# EAGLE board Bodenplatine_board (EAGLE 8.6.0)
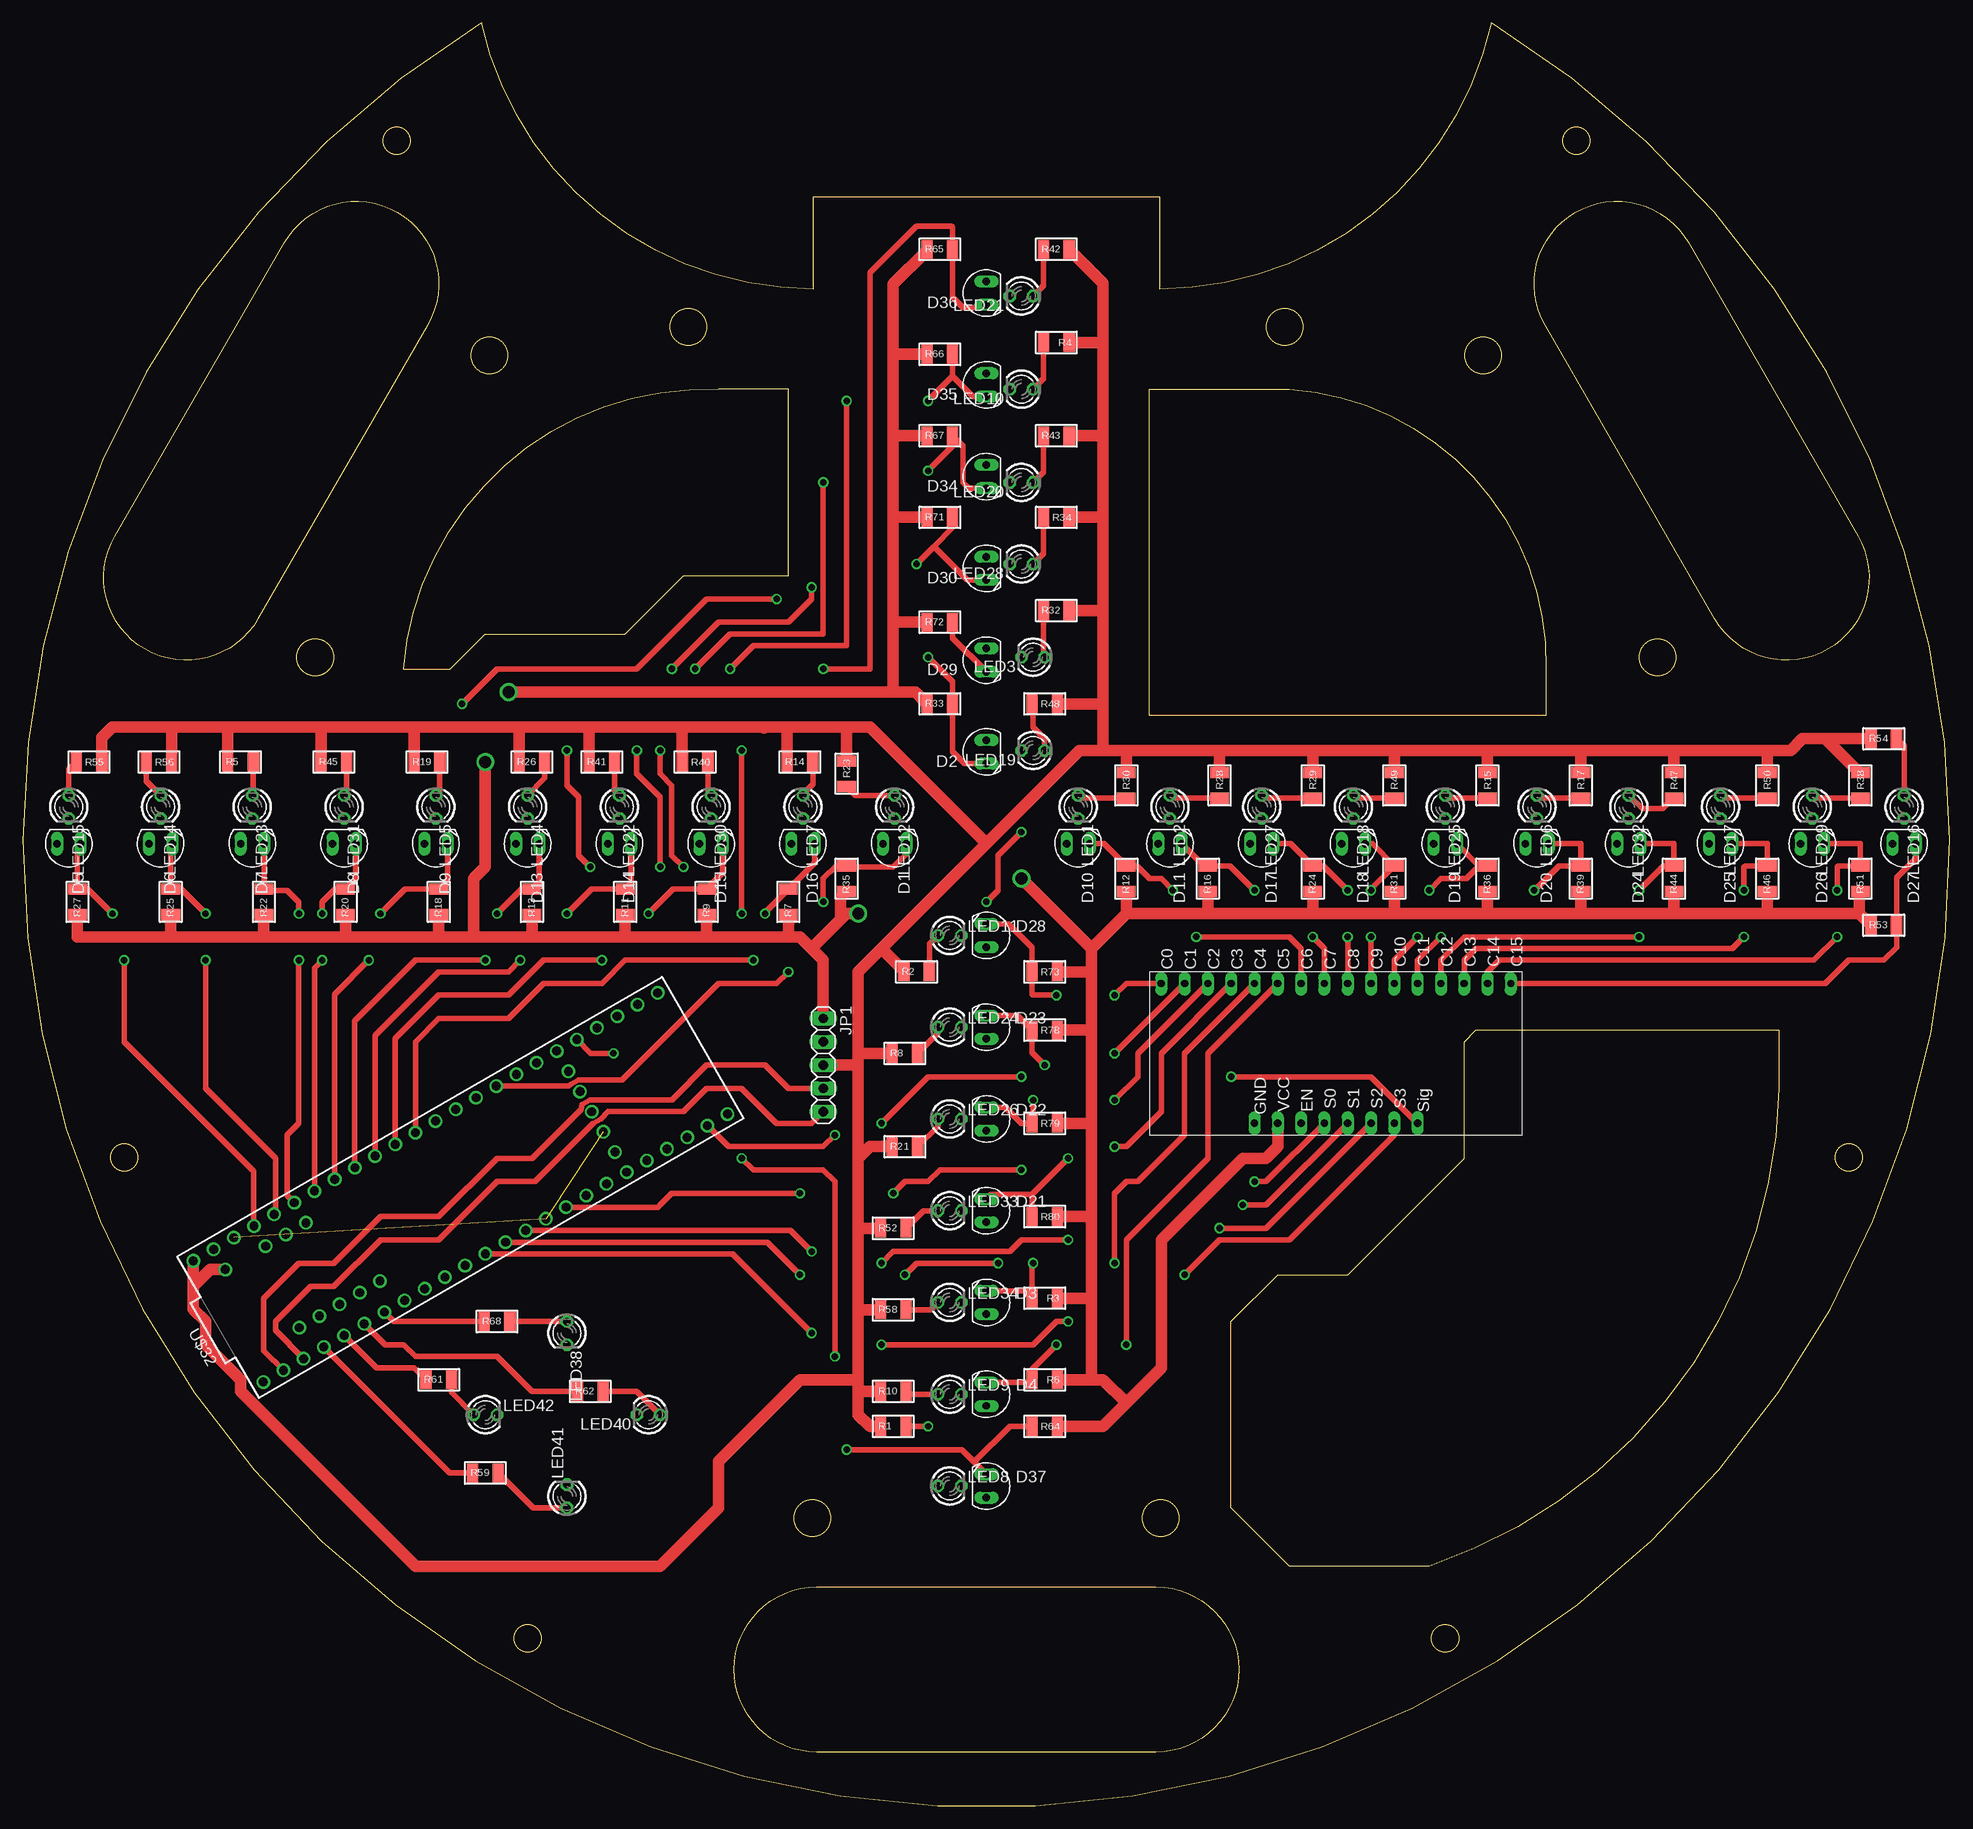
[diagram p0: board, top side]
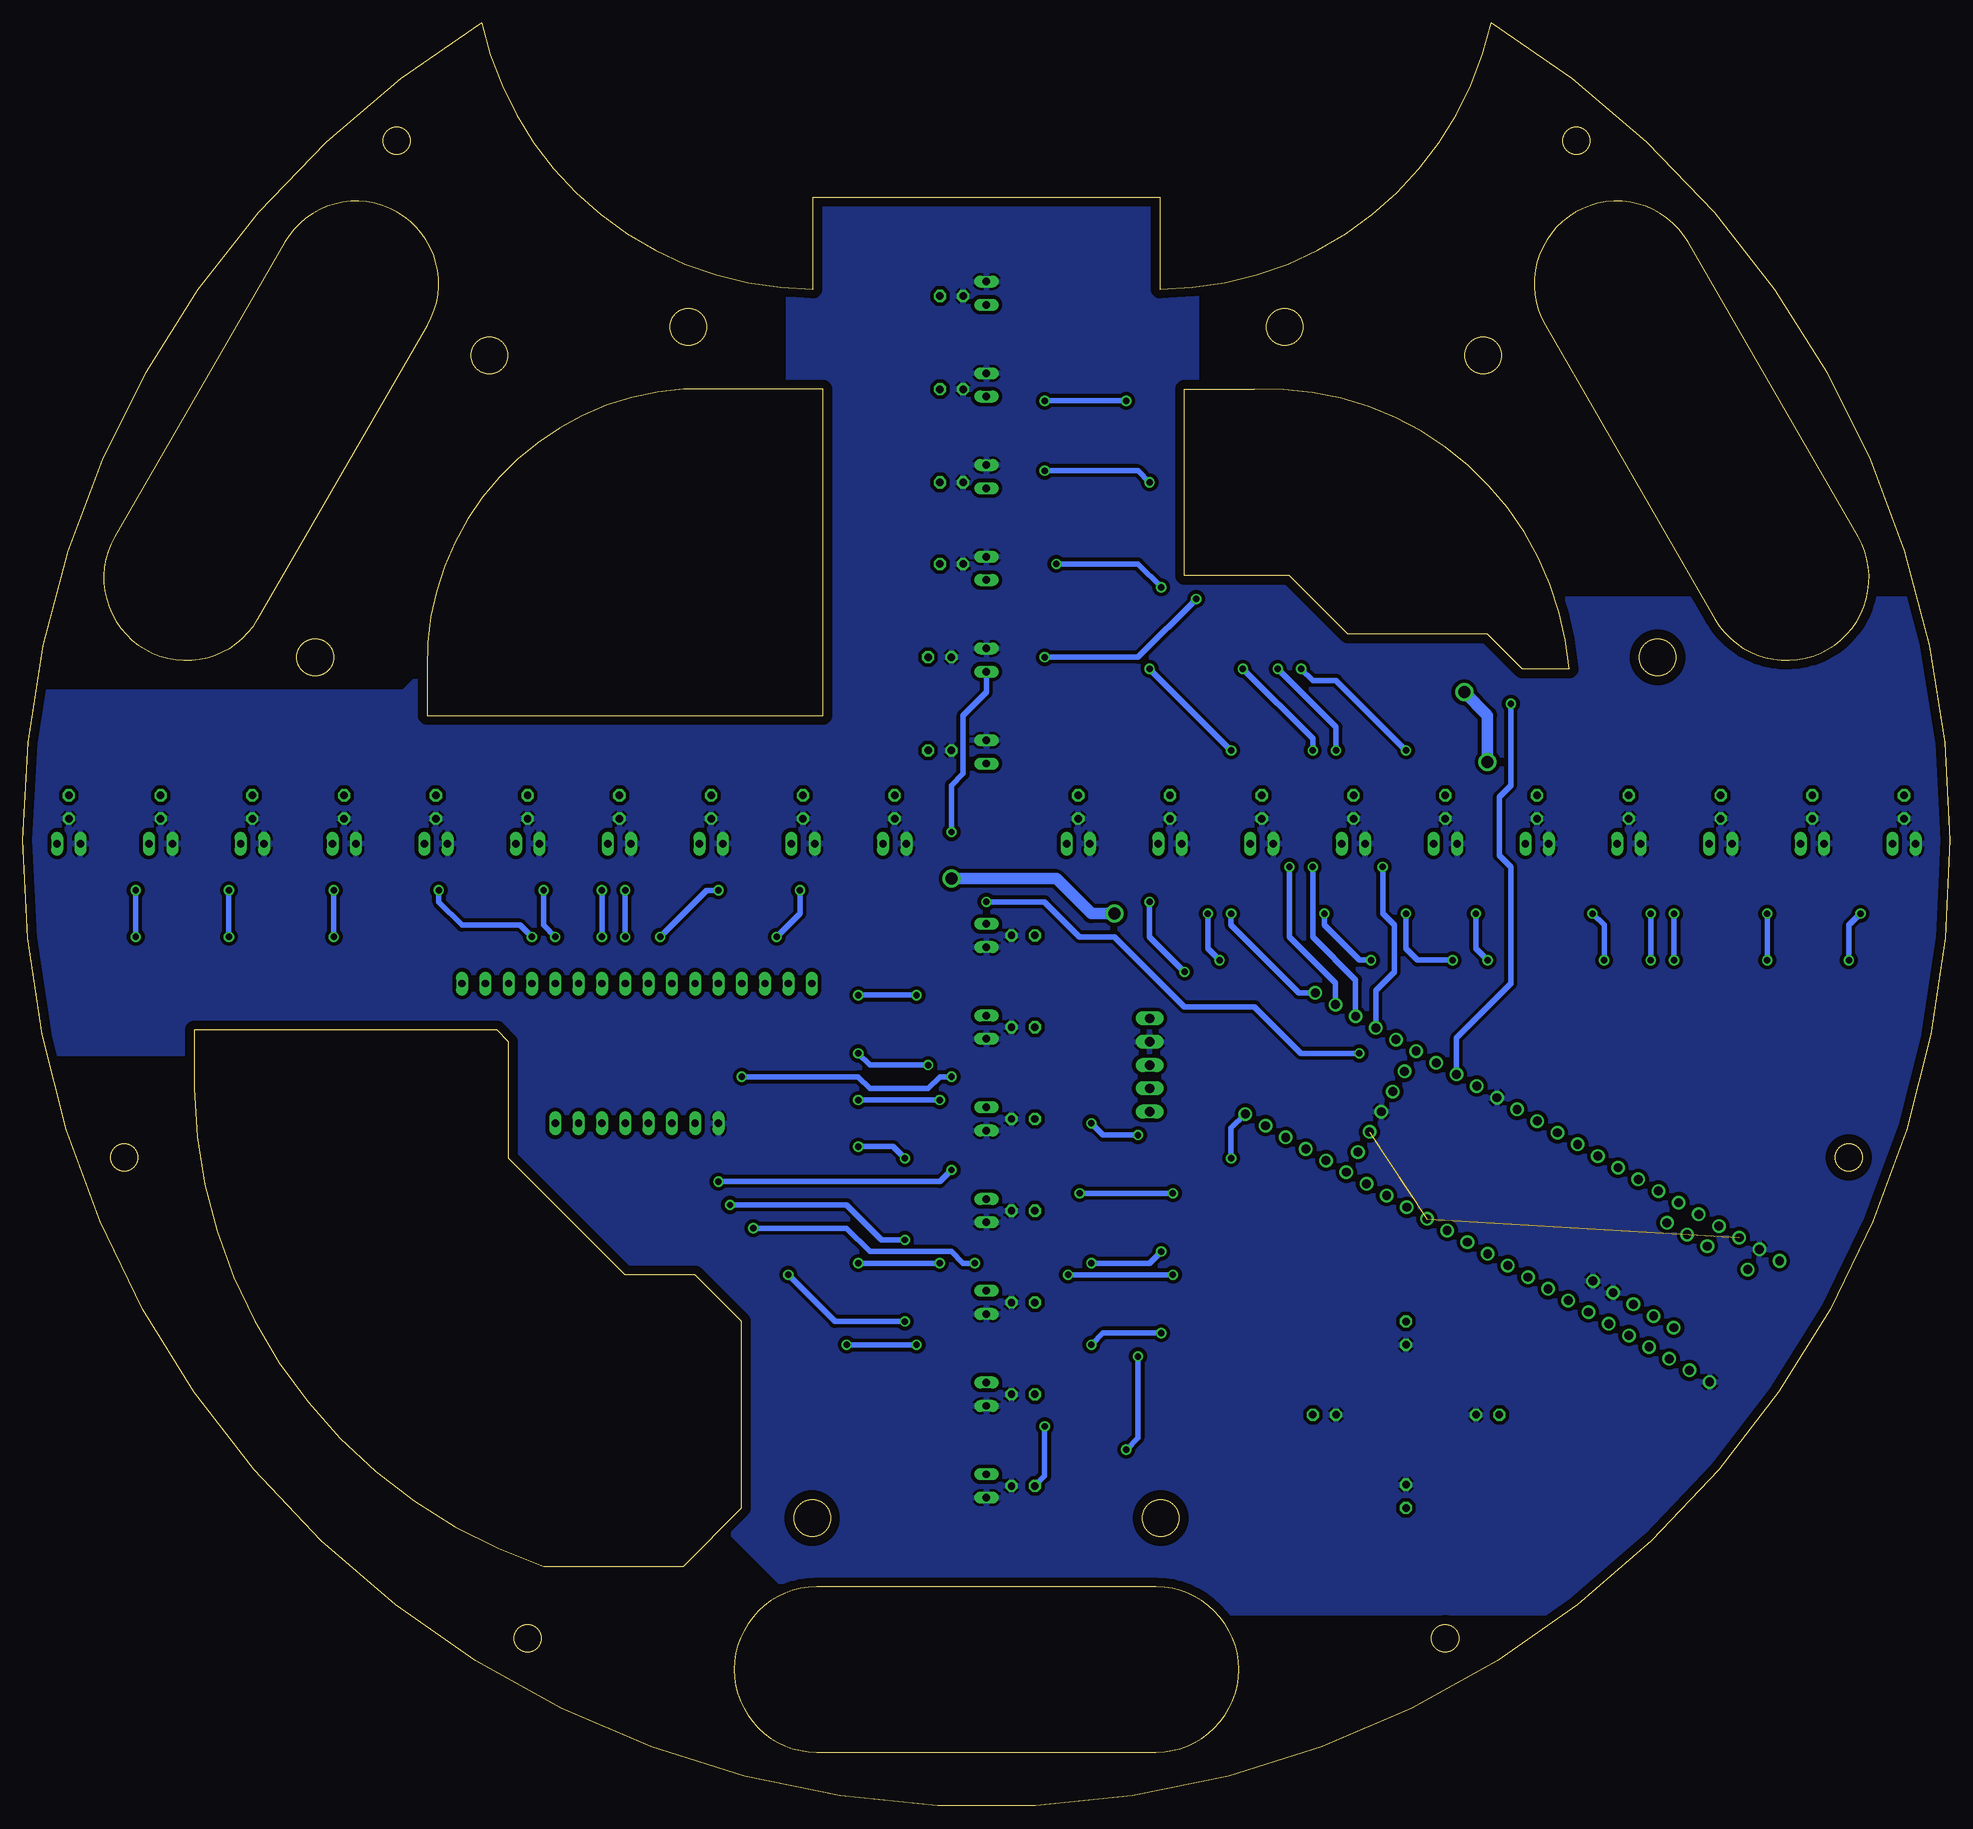
[diagram p1: board, bottom side, seen from below]

Size 210 x 194.31 mm. Coordinates in mm from the lower left corner, seen from the top.
Outline: 199.99,138.34 arc-180 184.4,129.34 165.9,161.39 arc-180 181.49,170.39 199.99,138.34
Outline: 86.5,5.86 arc-180 86.5,23.86 123.5,23.86 arc-180 123.5,5.86 86.5,5.86
Outline: 25.6,129.34 arc-180 10.01,138.34 28.51,170.39 arc-180 44.1,161.39 25.6,129.34
Outline: 123.88,165.31 123.88,175.31 86.12,175.31 86.12,165.31 arc-78 50,194.31 arc297 160,194.31 arc-78 123.88,165.31
Outline: 122.78,118.83 122.78,154.39 138.02,154.39 arc-88 165.96,123.91 165.96,118.83 122.78,118.83
Outline: 41.5,123.91 arc-88 75.79,154.39 83.41,154.39 83.41,134.07 71.98,134.07 65.63,127.72 50.39,127.72 46.58,123.91 41.5,123.91
Outline: 191.36,78.19 arc-70 153.26,26.12 138.02,26.12 131.67,32.47 131.67,52.79 136.75,57.87 144.37,57.87 157.07,70.57 157.07,83.27 158.34,84.54 191.36,84.54 191.36,78.19
Outline: circle at 124,31.36 radius 2
Outline: circle at 86,31.36 radius 2
Outline: circle at 178.15,125.16 radius 2
Outline: circle at 159.15,158.07 radius 2
Outline: circle at 50.85,158.07 radius 2
Outline: circle at 31.85,125.16 radius 2
Outline: circle at 137.5,161.16 radius 2
Outline: circle at 72.5,161.16 radius 2
Outline: circle at 169.28,181.47 radius 1.5
Outline: circle at 40.72,181.47 radius 1.5
Outline: circle at 155,18.26 radius 1.5
Outline: circle at 198.97,70.66 radius 1.5
Outline: circle at 55,18.26 radius 1.5
Outline: circle at 11.03,70.66 radius 1.5
Copper layers (1*16): Top 0.035mm / dielectric 1.5mm / Bottom 0.035mm
Design rules "default": minimum track width 6mil, minimum drill 0.35mm, track to track 6mil, track to pad 6mil, pad to pad 6mil, via to via 6mil, smd to smd 6mil, copper to edge 40mil, drill to drill 6mil, minimum pad ring 10mil, minimum via ring 8mil, stop-mask expansion 4mil, vias tented up to drill 0mil, thermal gap 10mil

## Footprints (pad centres in the part's own frame; a part is rotated, then mirrored left to right if it is on the bottom)
SFH205 = drill 0.813 long: A 0,-1.27; K 0,1.27
1X05 = drill 1.016 long: 1 -5.08,0; 2 -2.54,0; 3 0,0; 4 2.54,0; 5 5.08,0
LED3MM = drill 0.813 octagon: A -1.27,0; K 1.27,0
1206 = smd 1.219 x 2.032: 1 -1.397,0; 2 1.397,0
TEENSY_3.6_ALL_PINS = drill 0.965: 0 -7.62,25.4; 1 -7.62,22.86; 2 -7.62,20.32; 3 -7.62,17.78; 3.3V 7.62,22.86; 3.3V3 -7.62,-7.62; 3.3V4 -2.54,-17.78; 4 -7.62,15.24; 5 -7.62,12.7; 6 -7.62,10.16; 7 -7.62,7.62; 8 -7.62,5.08; 9 -7.62,2.54; 10 -7.62,0; 11 -7.62,-2.54; 12 -7.62,-5.08; 13 7.62,-5.08; 14/A0 7.62,-2.54; 15/A1 7.62,0; 16/A2 7.62,2.54; 17/A3 7.62,5.08; 18/A4 7.62,7.62; 19/A5 7.62,10.16; 20/A6 7.62,12.7; 21/A7 7.62,15.24; 22/A8 7.62,17.78; 23/A9 7.62,20.32; 24 -7.62,-10.16; 25 -7.62,-12.7; 26 -7.62,-15.24; 27 -7.62,-17.78; 28 -7.62,-20.32; 29 -7.62,-22.86; 30 -7.62,-25.4; 31/A12 -7.62,-27.94; 32/A13 -7.62,-30.48; 33/A14 7.62,-30.48; 34/A15 7.62,-27.94; 35/A16 7.62,-25.4; 36/A17 7.62,-22.86; 37/A18 7.62,-20.32; 38/A19 7.62,-17.78; 39/A20 7.62,-15.24; A10 5.08,17.78; A11 5.08,15.24; A21 7.62,-12.7; A22 7.62,-10.16; AGND 7.62,25.4; AREF 5.08,20.32; D+ -4.445,16.51; D- -4.445,19.05; GND -7.62,27.94; GND1 7.62,-7.62; GND3 -4.445,13.97; GND4 -4.445,11.43; GND6 0,-17.78; PGM 2.54,-17.78; RESET 5.08,-17.78; VBAT -5.08,-17.78; VIN 7.62,27.94; VUSB 5.08,25.4; VUSB1 -4.445,21.59
ANALOG/DIGITAL-MUX-BREAKOUT = drill 0.8 long: EN 16.51,16.51; GND 16.51,11.43; P$1 1.27,1.27; P$2 1.27,3.81; P$3 1.27,6.35; P$4 1.27,8.89; P$5 1.27,11.43; P$6 1.27,13.97; P$7 1.27,16.51; P$8 1.27,19.05; P$9 1.27,21.59; P$10 1.27,24.13; P$11 1.27,26.67; P$12 1.27,29.21; P$13 1.27,31.75; P$14 1.27,34.29; P$15 1.27,36.83; P$16 1.27,39.37; S0 16.51,19.05; S1 16.51,21.59; S2 16.51,24.13; S3 16.51,26.67; SIG 16.51,29.21; VCC 16.51,13.97

## Placement (x,y rotation side)
D1  SFH205  [SFH205]  95,104.86 270 top
D2  SFH205  [SFH205]  105,114.86 180 top
D3  SFH205  [SFH205]  105,54.86 0 top
D4  SFH205  [SFH205]  105,44.86 0 top
D5  SFH205  [SFH205]  5,104.86 270 top
D6  SFH205  [SFH205]  15,104.86 270 top
D7  SFH205  [SFH205]  25,104.86 270 top
D8  SFH205  [SFH205]  35,104.86 270 top
D9  SFH205  [SFH205]  45,104.86 270 top
D10  SFH205  [SFH205]  115,104.86 270 top
D11  SFH205  [SFH205]  125,104.86 270 top
D13  SFH205  [SFH205]  55,104.86 270 top
D14  SFH205  [SFH205]  65,104.86 270 top
D15  SFH205  [SFH205]  75,104.86 270 top
D16  SFH205  [SFH205]  85,104.86 270 top
D17  SFH205  [SFH205]  135,104.86 270 top
D18  SFH205  [SFH205]  145,104.86 270 top
D19  SFH205  [SFH205]  155,104.86 270 top
D20  SFH205  [SFH205]  165,104.86 270 top
D21  SFH205  [SFH205]  105,64.86 0 top
D22  SFH205  [SFH205]  105,74.86 0 top
D23  SFH205  [SFH205]  105,84.86 0 top
D24  SFH205  [SFH205]  175,104.86 270 top
D25  SFH205  [SFH205]  185,104.86 270 top
D26  SFH205  [SFH205]  195,104.86 270 top
D27  SFH205  [SFH205]  205,104.86 270 top
D28  SFH205  [SFH205]  105,94.86 0 top
D29  SFH205  [SFH205]  105,124.86 180 top
D30  SFH205  [SFH205]  105,134.86 180 top
D34  SFH205  [SFH205]  105,144.86 180 top
D35  SFH205  [SFH205]  105,154.86 180 top
D36  SFH205  [SFH205]  105,164.86 180 top
D37  SFH205  [SFH205]  105,34.86 0 top
JP1  [1X05]  87.22,80.73 270 top
LED1  [LED3MM]  115,108.86 270 top
LED2  [LED3MM]  125,108.86 270 top
LED3  [LED3MM]  110.08,125.18 180 top
LED4  [LED3MM]  55,108.86 270 top
LED5  [LED3MM]  45,108.86 270 top
LED6  [LED3MM]  165,108.86 270 top
LED7  [LED3MM]  85,108.86 270 top
LED8  [LED3MM]  101,34.86 0 top
LED9  [LED3MM]  101,44.86 0 top
LED10  [LED3MM]  108.81,154.39 180 top
LED11  [LED3MM]  101,94.86 0 top
LED12  [LED3MM]  95,108.86 270 top
LED14  [LED3MM]  15,108.86 270 top
LED15  [LED3MM]  5,108.86 270 top
LED16  [LED3MM]  205,108.86 270 top
LED17  [LED3MM]  185,108.86 270 top
LED18  [LED3MM]  145,108.86 270 top
LED19  [LED3MM]  110.08,115.02 180 top
LED20  [LED3MM]  108.81,144.23 180 top
LED21  [LED3MM]  108.81,164.55 180 top
LED22  [LED3MM]  65,108.86 270 top
LED23  [LED3MM]  24.99,108.86 270 top
LED24  [LED3MM]  101,84.86 0 top
LED25  [LED3MM]  155,108.86 270 top
LED26  [LED3MM]  101,74.86 0 top
LED27  [LED3MM]  135,108.86 270 top
LED28  [LED3MM]  108.81,135.34 180 top
LED29  [LED3MM]  195,108.86 270 top
LED30  [LED3MM]  75,108.86 270 top
LED31  [LED3MM]  35,108.86 270 top
LED32  [LED3MM]  175,108.86 270 top
LED33  [LED3MM]  101,64.86 0 top
LED34  [LED3MM]  101,54.86 0 top
LED38  [LED3MM]  59.28,51.52 270 top
LED40  [LED3MM]  68.17,42.63 180 top
LED41  [LED3MM]  59.28,33.74 90 top
LED42  [LED3MM]  50.39,42.63 0 top
R1  60R  [1206]  94.84,41.36 0 top
R2  60R  [1206]  97.38,90.89 0 top
R3  5k  [1206]  111.35,55.33 180 top
R4  60R  [1206]  112.62,159.47 180 top
R5  60R  [1206]  23.72,113.75 0 top
R6  5k  [1206]  111.35,46.44 180 top
R7  5k  [1206]  83.41,98.51 90 top
R8  60R  [1206]  96.11,82 0 top
R9  5k  [1206]  74.52,98.51 90 top
R10  60R  [1206]  94.84,45.17 0 top
R11  5k  [1206]  65.63,98.51 90 top
R12  5k  [1206]  120.24,101.05 90 top
R13  5k  [1206]  55.47,98.51 90 top
R14  60R  [1206]  84.68,113.75 0 top
R15  60R  [1206]  159.61,111.21 270 top
R16  5k  [1206]  129.13,101.05 90 top
R17  60R  [1206]  169.77,111.21 270 top
R18  5k  [1206]  45.31,98.51 90 top
R19  60R  [1206]  44.04,113.75 0 top
R20  5k  [1206]  35.15,98.51 90 top
R21  60R  [1206]  96.11,71.84 0 top
R22  5k  [1206]  26.26,98.51 90 top
R23  60R  [1206]  89.76,112.48 270 top
R24  5k  [1206]  140.56,101.05 90 top
R25  5k  [1206]  16.1,98.51 90 top
R26  60R  [1206]  55.47,113.75 0 top
R27  5k  [1206]  5.94,98.51 90 top
R28  60R  [1206]  130.4,111.21 270 top
R29  60R  [1206]  140.56,111.21 270 top
R30  60R  [1206]  120.24,111.21 270 top
R31  5k  [1206]  149.45,101.05 90 top
R32  60R  [1206]  112.62,130.26 0 top
R33  5k  [1206]  99.92,120.1 0 top
R34  60R  [1206]  112.62,140.42 180 top
R35  5k  [1206]  89.76,101.05 90 top
R36  5k  [1206]  159.61,101.05 90 top
R38  60R  [1206]  200.25,111.21 270 top
R39  5k  [1206]  169.77,101.05 90 top
R40  60R  [1206]  73.25,113.75 180 top
R41  60R  [1206]  63.09,113.75 0 top
R42  60R  [1206]  112.62,169.63 0 top
R43  60R  [1206]  112.62,149.31 0 top
R44  5k  [1206]  179.93,101.05 90 top
R45  60R  [1206]  33.88,113.75 0 top
R46  5k  [1206]  190.09,101.05 90 top
R47  60R  [1206]  179.93,111.21 270 top
R48  60R  [1206]  111.35,120.1 180 top
R49  60R  [1206]  149.45,111.21 270 top
R50  60R  [1206]  190.09,111.21 270 top
R51  5k  [1206]  200.25,101.05 90 top
R52  60R  [1206]  94.84,62.95 0 top
R53  5k  [1206]  202.79,95.97 0 top
R54  60R  [1206]  202.79,116.29 0 top
R55  60R  [1206]  7.21,113.75 180 top
R56  60R  [1206]  14.83,113.75 180 top
R58  60R  [1206]  94.84,54.06 0 top
R59  60R  [1206]  50.39,36.28 0 top
R61  60R  [1206]  45.31,46.44 0 top
R62  60R  [1206]  61.82,45.17 0 top
R64  5k  [1206]  111.35,41.36 180 top
R65  5k  [1206]  99.92,169.63 0 top
R66  5k  [1206]  99.92,158.2 0 top
R67  5k  [1206]  99.92,149.31 0 top
R68  60R  [1206]  51.66,52.79 0 top
R71  5k  [1206]  99.92,140.42 0 top
R72  5k  [1206]  99.92,128.99 0 top
R73  5k  [1206]  111.35,90.89 180 top
R78  5k  [1206]  111.35,84.54 180 top
R79  5k  [1206]  111.35,74.38 180 top
R80  5k  [1206]  111.35,64.22 180 top
U$32  TEENSY_3.6_ALL_PINS  [TEENSY_3.6_ALL_PINS]  46.58,66.76 120 top
X1  ANALOG/DIGITAL-MUX-BREAKOUT  [ANALOG/DIGITAL-MUX-BREAKOUT]  122.78,90.89 270 top

## Library data of the parts
D1-D11 D13-D30 D34-D37 = opto-trans-siemens; OC_FARNELL: unknown; OC_NEWARK: unknown
JP1 = pinhead
LED1-LED12 LED14-LED34 LED38 LED40-LED42 = led
R1-R36 R38-R56 R58 R59 R61 R62 R64-R68 R71-R73 R78-R80 = R
U$32 = Teensy_3_and_LC_Series_Boards_v1.4
X1 = Analog-Digital

## Nets
3.3V: U$32.3.3V U$32.3.3V3 U$32.3.3V4
+3V3: JP1.1 R3.1 R6.1 R7.1 R9.1 R11.1 R12.1 R13.1 R16.1 R18.1 R20.1 R22.1 R24.1 R25.1 R27.1 R31.1 R33.1 R35.1 R36.1 R39.1 R44.1 R46.1 R51.1 R53.1 R64.1 R65.1 R66.1 R67.1 R71.1 R72.1 R73.1 R78.1 R79.1 R80.1 X1.VCC
+5V: JP1.3 R1.1 R2.1 R4.1 R5.1 R8.1 R10.1 R14.1 R15.1 R17.1 R19.1 R21.1 R23.1 R26.1 R28.1 R29.1 R30.1 R32.2 R34.1 R38.1 R40.2 R41.1 R42.2 R43.2 R45.1 R47.1 R48.1 R49.1 R50.1 R52.1 R54.1 R55.1 R56.1 R58.1 U$32.VIN U$32.VUSB
A1: D16.K R7.2 U$32.15/A1
A2: D15.K R9.2 U$32.16/A2
A3: D14.K R11.2 U$32.17/A3
A4: D13.K R13.2 U$32.18/A4
A5: D9.K R18.2 U$32.19/A5
A6: D8.K R20.2 U$32.20/A6
A7: D7.K R22.2 U$32.21/A7
A8: D6.K R25.2 U$32.22/A8
A9: D5.K R27.2 U$32.23/A9
A10: D2.K R33.2 U$32.A21
A11: D1.K R35.2 U$32.A22
A13: D37.K R64.2 U$32.32/A13
A14: D36.K R65.2 U$32.33/A14
A15: D35.K R66.2 U$32.34/A15
A16: D34.K R67.2 U$32.35/A16
A17: D30.K R71.2 U$32.36/A17
A18: D29.K R72.2 U$32.37/A18
A19: D28.K R73.2 X1.P$1
A20: D23.K R78.2 X1.P$2
A21: D22.K R79.2 X1.P$3
A22: D21.K R80.2 X1.P$4
A23: D3.K R3.2 X1.P$5
A24: D4.K R6.2 X1.P$6
A25: D10.K R12.2 X1.P$7
A26: D11.K R16.2 X1.P$8
A27: D17.K R24.2 X1.P$9
A28: D18.K R31.2 X1.P$10
A29: D19.K R36.2 X1.P$11
A30: D20.K R39.2 X1.P$12
A31: D24.K R44.2 X1.P$13
A32: D25.K R46.2 X1.P$14
A33: D26.K R51.2 X1.P$15
A34: D27.K R53.2 X1.P$16
AREF: U$32.AREF
GND: D1.A D2.A D3.A D4.A D5.A D6.A D7.A D8.A D9.A D10.A D11.A D13.A D14.A D15.A D16.A D17.A D18.A D19.A D20.A D21.A D22.A D23.A D24.A D25.A D26.A D27.A D28.A D29.A D30.A D34.A D35.A D36.A D37.A JP1.2 LED1.K LED2.K LED3.K LED4.K LED5.K LED6.K LED7.K LED8.K LED9.K LED10.K LED11.K LED12.K LED14.K LED15.K LED16.K LED17.K LED18.K LED19.K LED20.K LED21.K LED22.K LED23.K LED24.K LED25.K LED26.K LED27.K LED28.K LED29.K LED30.K LED31.K LED32.K LED33.K LED34.K LED38.K LED40.K LED41.K LED42.K U$32.AGND U$32.GND U$32.GND1 U$32.GND3 U$32.GND4 U$32.GND6 X1.GND
N$1: LED8.A R1.2
N$2: LED11.A R2.2
N$3: LED23.A R5.2
N$4: LED10.A R4.2
N$5: LED24.A R8.2
N$6: LED25.A R15.2
N$7: LED26.A R21.2
N$8: LED27.A R29.2
N$9: LED28.A R34.2
N$10: LED9.A R10.2
N$11: LED29.A R38.2
N$12: LED30.A R40.1
N$13: LED12.A R23.2
N$14: LED31.A R45.2
N$15: LED32.A R47.2
N$16: LED7.A R14.2
N$17: LED33.A R52.2
N$18: LED6.A R17.2
N$19: LED3.A R32.1
N$20: LED5.A R19.2
N$21: LED34.A R58.2
N$22: LED41.A R59.2
N$23: LED42.A R61.2
N$24: LED40.A R62.2
N$25: LED38.A R68.2
N$26: LED4.A R26.2
N$28: LED2.A R28.2
N$30: LED1.A R30.2
N$33: R68.1 U$32.5
N$42: LED22.A R41.2
N$44: LED21.A R42.1
N$46: LED20.A R43.1
N$56: LED19.A R48.2
N$58: LED18.A R49.2
N$60: LED17.A R50.2
N$68: LED16.A R54.2
N$70: LED15.A R55.2
N$72: LED14.A R56.2
RIX2: R62.1 U$32.4
RIX3: R61.1 U$32.3
RIX4: R59.1 U$32.2
RX: JP1.5 U$32.1
S_0: U$32.24 X1.S0
S_1: U$32.12 X1.S1
S_2: U$32.11 X1.S2
S_3: U$32.10 X1.S3
SIG: U$32.31/A12 X1.SIG
TX: JP1.4 U$32.0
VBAT: U$32.VBAT
VUSB1: U$32.VUSB1

## Tracks (layer width: path | path; a pad name or v marks a point on that pad's centre or on a via)
3.3V  (2 unrouted)
+3V3  (via drill 1.3)
  Top 1.27: JP1.1 87.22,92.16 85.95,93.43 | 85.95,93.43 84.68,94.7 83.41,94.7 | R27.1 5.94,94.7 16.1,94.7 | 16.1,94.7 26.26,94.7 | 26.26,94.7 35.15,94.7 | 35.15,94.7 45.31,94.7 | 45.31,94.7 49.12,94.7 | 49.12,94.7 55.47,94.7 | 55.47,94.7 65.63,94.7 | 65.63,94.7 74.52,94.7 | 74.52,94.7 83.41,94.7 | R25.1 16.1,94.7 | R22.1 26.26,94.7 | R20.1 35.15,94.7 | R18.1 45.31,94.7 | R13.1 55.47,94.7 | R11.1 65.63,94.7 | R9.1 74.52,94.7 | 49.12,94.7 49.12,101.05 50.39,102.32 v50.39,113.75 | v52.93,121.37 94.84,121.37 | 94.84,121.37 94.84,128.99 | 94.84,128.99 94.84,140.42 | 94.84,140.42 94.84,149.31 | 94.84,149.31 94.84,158.2 | 94.84,158.2 94.84,165.82 98.52,169.51 R65.1 | 85.95,93.43 89.12,96.61 | 89.12,96.61 89.76,97.24 v91.03,97.24 | v108.81,101.05 116.43,93.43 | 116.43,93.43 116.43,90.89 | 116.43,90.89 116.43,84.54 | 116.43,84.54 116.43,74.38 | 116.43,74.38 116.43,64.22 | 116.43,64.22 116.43,55.33 | 116.43,55.33 116.43,46.44 | 116.43,93.43 120.24,97.24 | 200.12,97.24 R53.1 | 120.24,97.24 129.13,97.24 | 129.13,97.24 140.56,97.24 | 140.56,97.24 149.45,97.24 | 149.45,97.24 159.61,97.24 | 159.61,97.24 169.77,97.24 | 169.77,97.24 179.93,97.24 | 179.93,97.24 190.09,97.24 | 190.09,97.24 200.12,97.24 | 120.24,97.24 R12.1 | R16.1 129.13,97.24 | R24.1 140.56,97.24 | R31.1 149.45,97.24 | R36.1 159.61,97.24 | R39.1 169.77,97.24 | R44.1 179.93,97.24 | R46.1 190.09,97.24 | R51.1 200.12,99.53 200.12,97.24 | R73.1 116.43,90.89 | R78.1 116.43,84.54 | R79.1 116.43,74.38 | R80.1 116.43,64.22 | R3.1 116.43,55.33 | R6.1 116.43,46.44 | X1.VCC 136.75,71.84 135.48,70.57 132.94,70.57 124.05,61.68 124.05,47.71 120.24,43.9 | R66.1 94.84,158.2 | R67.1 94.84,149.31 | R71.1 94.84,140.42 | R72.1 94.84,128.99 | R33.1 97.25,121.37 94.84,121.37
  Top 1.27: 89.12,96.61 89.12,99.02 R35.1 | 120.24,43.9 117.7,41.36 R64.1 | 116.43,46.44 117.7,46.44 120.24,43.9 | R7.1 83.41,94.7
  Bottom 1.27: v50.39,113.75 50.39,118.83 v52.93,121.37 | v91.03,97.24 93.57,97.24 97.38,101.05 v108.81,101.05
+5V
  Top 0.61: 93.57,93.31 93.57,93.43
  Top 1.27: JP1.3 91.03,80.73 | 91.03,80.73 91.03,70.57 | 91.03,70.57 91.03,62.95 | 91.03,62.95 91.03,54.06 | 91.03,54.06 91.03,46.44 | 91.03,80.73 91.03,82 | 91.03,82 91.03,90.89 93.57,93.43 | 93.57,93.43 105,104.86 | 105,104.86 92.3,117.56 89.76,117.56 | 16.1,117.56 9.75,117.56 8.61,116.42 R55.1 | 16.1,117.56 22.45,117.56 | 22.45,117.56 32.61,117.56 | 32.61,117.56 42.77,117.56 | 61.82,117.56 71.98,117.56 | 71.98,117.56 80.87,117.56 | 80.87,117.56 83.41,117.56 | 83.41,117.56 89.76,117.56 | 117.7,115.02 115.16,115.02 105,104.86 | 117.7,115.02 117.7,120.1 | 117.7,120.1 117.7,130.26 | 117.7,130.26 117.7,140.42 | 117.7,140.42 117.7,149.31 | 117.7,149.31 117.7,159.47 | 117.7,159.47 117.7,165.95 R42.2 | R48.1 117.7,120.1 | R32.2 117.7,130.26 | R34.1 117.7,140.42 | R43.2 117.7,149.31 | R4.1 117.7,159.47 | 117.7,115.02 120.24,115.02 | 120.24,115.02 130.4,115.02 | 130.4,115.02 140.56,115.02 | 140.56,115.02 149.45,115.02 | 149.45,115.02 159.61,115.02 | 159.61,115.02 169.77,115.02 | 169.77,115.02 179.93,115.02 | 179.93,115.02 190.09,115.02 | 190.09,115.02 192.63,115.02 193.9,116.29 196.44,116.29 | 196.44,116.29 R54.1 | R30.1 120.24,115.02 | R28.1 130.4,115.02 | R29.1 140.56,115.02 | R49.1 149.45,115.02 | R15.1 159.61,115.02 | R17.1 169.77,115.02 | R47.1 179.93,115.02 | R50.1 190.09,115.02 | R38.1 200.12,112.61 196.44,116.29 | R56.1 16.23,117.44 16.1,117.56 | R5.1 22.32,117.44 22.45,117.56 | R45.1 32.48,117.44 32.61,117.56 | R19.1 42.64,117.44 42.77,117.56 | R41.1 61.69,117.44 61.82,117.56 | R40.2 71.85,117.44 71.98,117.56 | 80.74,117.44 80.87,117.56 | 42.77,117.56 54.2,117.56 | 54.2,117.56 61.82,117.56 | R26.1 54.07,117.44 54.2,117.56 | R14.1 83.28,117.44 83.41,117.56 | R23.1 89.76,117.56
  Top 1.27: U$32.VIN 18.57,56.6 | 18.57,56.6 18.57,54.13 19.91,52.79 19.91,50.25 23.72,46.44 23.72,45.17 42.77,26.12 69.44,26.12 75.79,32.47 75.79,37.55 84.68,46.44 91.03,46.44 | R1.1 92.3,41.36 91.03,42.63 91.03,45.17 | 91.03,46.44 91.03,45.17 | R10.1 91.03,45.17 | R58.1 91.03,54.06 | R52.1 91.03,62.95 | R21.1 92.3,71.84 91.03,70.57 | R2.1 95.98,91.02 93.57,93.43 | R8.1 91.03,82 | U$32.VUSB 20.43,58.46 18.57,56.6
A1  (via drill 0.7)
  Top 0.61: U$32.15/A1 42.77,83.27 45.31,85.81 52.93,85.81 56.74,89.62 63.09,89.62 65.63,92.16 v79.6,92.16 | v80.87,97.24 80.87,97.37 R7.2 86.27,102.77 D16.K
  Bottom 0.61: v79.6,92.16 80.87,93.43 v80.87,97.24
A2  (via drill 0.7)
  Top 0.61: U$32.16/A2 40.57,83.61 45.31,88.35 52.93,88.35 56.74,92.16 v63.09,92.16 | v68.17,97.24 70.84,99.91 R9.2 76.27,101.66 D15.K
  Bottom 0.61: v63.09,92.16 64.36,92.16 68.17,95.97 v68.17,97.24
A3  (via drill 0.7)
  Top 0.61: U$32.17/A3 38.37,83.96 45.31,90.89 52.93,90.89 v54.2,92.16 | v59.28,97.24 61.95,99.91 R11.2 66.27,100.55 D14.K
  Bottom 0.61: v54.2,92.16 58.01,92.16 59.28,93.43 v59.28,97.24
A4  (via drill 0.7)
  Top 0.61: U$32.18/A4 36.17,85.57 42.77,92.16 v50.39,92.16 | v51.66,97.24 54.33,99.91 R13.2 56.27,100.71 D13.K
  Bottom 0.61: v50.39,92.16 51.66,93.43 v51.66,97.24
A5  (via drill 0.7)
  Top 0.61: U$32.19/A5 33.97,88.45 v37.69,92.16 | v38.96,97.24 41.63,99.91 R18.2 46.27,100.87 D9.K
  Bottom 0.61: v37.69,92.16 37.69,95.97 v38.96,97.24
A6  (via drill 0.7)
  Top 0.61: U$32.20/A6 31.77,91.33 v32.61,92.16 | v32.61,97.24 32.61,98.51 34.01,99.91 R20.2 36.27,101.03 D8.K
  Bottom 0.61: v32.61,92.16 v32.61,97.24
A7  (via drill 0.7)
  Top 0.61: D7.K R22.2 26.39,99.78 28.8,99.78 30.07,98.51 v30.07,97.24 | v30.07,92.16 30.07,74.38 28.8,73.11 28.8,66.52 U$32.21/A7
  Bottom 0.61: v30.07,97.24 v30.07,92.16
A8  (via drill 0.7)
  Top 0.61: D6.K 16.1,104.69 R25.2 17.24,99.91 v19.91,97.24 | v19.91,92.16 19.91,78.19 27.53,70.57 27.53,64.63 U$32.22/A8
  Bottom 0.61: v19.91,97.24 v19.91,92.16
A9  (via drill 0.7)
  Top 0.61: U$32.23/A9 25.17,69.12 11.02,83.27 v11.02,92.16 | D5.K 5.94,104.53 R27.2 7.08,99.91 v9.75,97.24
  Bottom 0.61: v11.02,92.16 11.02,95.97 v9.75,97.24
A10  (via drill 0.7)
  Top 0.61: D2.K 102.62,113.59 101.32,114.9 R33.2 101.32,122.52 v98.65,125.18 | v47.85,120.1 51.66,123.91 66.9,123.91 74.52,131.53 v82.14,131.53
  Bottom 0.61: U$32.A21 53.77,83.71 47.85,89.62 47.85,102.32 49.12,103.59 49.12,109.94 47.85,111.21 v47.85,120.1 | v82.14,131.53 88.49,125.18 v98.65,125.18
A11  (via drill 0.7)
  Top 0.61: U$32.A22 53.9,78.44 53.94,78.43 53.96,78.44 59.49,78.44 59.68,78.64 60.54,79.14 65.3,79.14 75.79,89.62 82.14,89.62 v83.41,90.89 | v87.22,98.51 87.22,101.05 88.62,102.45 R35.2 89.89,102.32 94.84,102.32 96.27,103.75 D1.K
  Bottom 0.61: v83.41,90.89 87.22,94.7 v87.22,98.51
A13  (via drill 0.7)
  Top 0.61: v78.33,70.57 79.6,69.3 87.22,69.3 88.49,68.03 v88.49,48.98 | D37.K 103.65,37.48 | 103.65,37.48 102.31,38.82 v89.76,38.82 | R64.2 107.54,41.36 103.65,37.48
  Bottom 0.61: U$32.32/A13 78.33,73.86 v78.33,70.57 | v89.76,38.82 88.49,40.09 v88.49,48.98
A14  (via drill 0.7)
  Top 0.61: v78.33,97.24 v78.33,115.02 | v87.22,123.91 92.3,123.91 92.3,167.09 97.38,172.17 101.19,172.17 101.32,172.05 R65.2 101.32,164.43 102.46,163.28 104.69,163.28 D36.K
  Bottom 0.61: U$32.33/A14 70.96,88.6 78.33,95.97 v78.33,97.24 | v78.33,115.02 v87.22,123.91
A15  (via drill 0.7)
  Top 0.61: v71.98,102.32 70.71,103.59 70.71,111.21 69.44,112.48 v69.44,115.02 | v77.06,123.91 79.6,126.45 89.76,126.45 v89.76,153.12 | v98.65,153.12 101.32,155.79 | 101.32,155.79 R66.2 | 101.32,155.79 103.51,153.59 D35.K
  Bottom 0.61: U$32.34/A15 66.97,89.69 71.98,94.7 v71.98,102.32 | v69.44,115.02 69.44,116.29 v77.06,123.91 | v89.76,153.12 v98.65,153.12
A16  (via drill 0.7)
  Top 0.61: v69.44,102.32 69.44,109.94 66.9,112.48 v66.9,115.02 | v73.25,123.91 77.06,127.72 87.22,127.72 v87.22,144.23 | v98.65,145.5 101.32,148.17 R67.2 102.46,148.17 102.46,144.23 103.1,143.59 D34.K
  Bottom 0.61: U$32.35/A16 64.77,90.03 69.44,94.7 v69.44,102.32 | v66.9,115.02 66.9,117.56 v73.25,123.91 | v87.22,144.23 88.49,145.5 v98.65,145.5
A17  (via drill 0.7)
  Top 0.61: v61.82,102.32 60.55,103.59 60.55,109.94 59.28,111.21 v59.28,115.02 | v70.71,123.91 75.79,128.99 83.41,128.99 85.95,131.53 v85.95,132.8 | v97.38,135.34 99.28,137.25 | 99.28,137.25 101.32,139.28 R71.2 | D30.K 102.94,133.59 99.28,137.25
  Bottom 0.61: U$32.36/A17 62.57,88.88 60.55,90.89 60.55,95.97 61.82,97.24 v61.82,102.32 | v59.28,115.02 66.9,122.64 69.44,122.64 v70.71,123.91 | v85.95,132.8 88.49,135.34 v97.38,135.34
A18  (via drill 0.7)
  Top 0.61: U$32.37/A18 61.89,82 v64.36,82 | v105,98.51 106.27,99.78 106.27,103.59 v108.81,106.13 | R72.2 101.32,127.28 D29.K
  Bottom 0.61: v64.36,82 70.71,82 75.79,87.08 83.41,87.08 91.03,94.7 94.84,94.7 98.65,98.51 v105,98.51 | v108.81,106.13 108.81,111.21 107.54,112.48 107.54,118.83 105,121.37 D29.K 104.68,123.91
A19  (via drill 0.7)
  Top 0.61: X1.P$1 120.24,89.62 v118.97,88.35 | v112.62,88.35 110.08,88.35 109.95,88.48 R73.2 109.95,93.56 107.38,96.13 D28.K
  Bottom 0.61: v118.97,88.35 v112.62,88.35
A20  (via drill 0.7)
  Top 0.61: X1.P$2 v118.97,82 | v111.35,80.73 109.95,82.13 R78.2 108.36,86.13 D23.K
  Bottom 0.61: v118.97,82 117.7,80.73 v111.35,80.73
A21  (via drill 0.7)
  Top 0.61: X1.P$3 121.51,82 121.51,79.46 v118.97,76.92 | v110.08,76.92 110.08,74.51 R79.2 108.81,74.38 107.06,76.13 D22.K
  Bottom 0.61: v118.97,76.92 v110.08,76.92
A22  (via drill 0.7)
  Top 0.61: X1.P$4 124.05,82 124.05,75.65 120.24,71.84 v118.97,71.84 | v113.89,70.57 109.95,66.64 | 109.95,66.64 R80.2 | 109.95,66.64 105.5,66.64 D21.K
  Bottom 0.61: v118.97,71.84 115.16,71.84 v113.89,70.57
A23  (via drill 0.7)
  Top 0.61: X1.P$5 126.59,82 126.59,73.11 121.51,68.03 120.24,68.03 118.97,66.76 v118.97,59.14 | v110.08,59.14 109.95,59.02 R3.2 109.15,56.13 D3.K
  Bottom 0.61: v118.97,59.14 v110.08,59.14
A24  (via drill 0.7)
  Top 0.61: X1.P$6 129.13,82 129.13,70.57 120.24,61.68 v120.24,50.25 | v112.62,50.25 109.95,47.59 R6.2 109.64,46.13 D4.K
  Bottom 0.61: v120.24,50.25 v112.62,50.25
A25  (via drill 0.7)
  Top 0.61: X1.P$7 139.29,93.43 138.02,94.7 v127.86,94.7 | v125.32,99.78 124.05,101.05 122.78,101.05 121.38,102.45 R12.2 117.83,104.86 D10.K
  Bottom 0.61: v127.86,94.7 125.32,97.24 v125.32,99.78
A26  (via drill 0.7)
  Top 0.61: D11.K 128.68,102.45 R16.2 131.54,102.45 v134.21,99.78 | X1.P$8 141.83,93.43 v140.56,94.7
  Bottom 0.61: v140.56,94.7 135.48,99.78 v134.21,99.78
A27  (via drill 0.7)
  Top 0.61: X1.P$9 v144.37,94.7 | v144.37,99.78 141.7,102.45 R24.2 138.15,104.86 D17.K
  Bottom 0.61: v144.37,94.7 v144.37,99.78
A28  (via drill 0.7)
  Top 0.61: D18.K 147.04,104.86 R31.2 146.91,99.91 v146.91,99.78 | X1.P$10 v146.91,94.7
  Bottom 0.61: v146.91,94.7 v146.91,99.78
A29  (via drill 0.7)
  Top 0.61: R36.2 158.68,102.45 | 158.68,102.45 D19.K | X1.P$11 149.45,92.16 v151.99,94.7 | v153.26,99.78 154.53,101.05 157.29,101.05 158.68,102.45
  Bottom 0.61: v151.99,94.7 153.26,95.97 v153.26,99.78
A30  (via drill 0.7)
  Top 0.61: D20.K 169.77,104.86 R39.2 167.36,102.45 v164.69,99.78 | X1.P$12 151.99,92.16 v154.53,94.7
  Bottom 0.61: v154.53,94.7 155.8,95.97 162.15,95.97 164.69,98.51 v164.69,99.78
A31  (via drill 0.7)
  Top 0.61: D24.K 179.93,104.86 R44.2 178.79,102.45 v176.12,99.78 | X1.P$13 154.53,92.16 157.07,94.7 v176.12,94.7
  Bottom 0.61: v176.12,94.7 v176.12,99.78
A32  (via drill 0.7)
  Top 0.61: D25.K 190.09,104.86 R46.2 187.68,102.45 187.55,102.32 v187.55,99.78 | X1.P$14 157.07,92.16 158.34,93.43 186.28,93.43 v187.55,94.7
  Bottom 0.61: v187.55,94.7 v187.55,99.78
A33  (via drill 0.7)
  Top 0.61: D26.K 200.25,104.86 R51.2 197.84,102.45 197.71,102.32 v197.71,99.78 | X1.P$15 159.61,90.89 160.88,92.16 195.17,92.16 v197.71,94.7
  Bottom 0.61: v197.71,94.7 v197.71,99.78
A34
  Top 0.61: D27.K 206.27,103.26 204.19,101.18 R53.2 204.19,93.56 202.79,92.16 198.98,92.16 196.44,89.62 X1.P$16
GND
  pour Bottom (isolate 0.406): -9.3,131.53 64.36,131.53 71.98,139.15 82.14,139.15 82.14,178.52 83.41,179.79 126.59,179.79 126.59,123.91 165.96,123.91 168.5,121.37 209.14,121.37 214.22,116.29 214.22,87.08 211.68,84.54 209.14,82 162.15,82 160.88,80.73 160.88,57.87 125.32,22.31 125.32,21.04 21.18,21.04 -9.3,51.52
N$1  (via drill 0.7)
  Top 0.61: R1.2 v98.65,41.36
  Bottom 0.61: v98.65,41.36 98.65,35.94 LED8.A
N$2
  Top 0.61: R2.2 98.78,93.91 LED11.A
N$3
  Top 0.61: LED23.A 25.12,110.26 R5.2
N$4
  Top 0.61: R4.2 111.22,155.54 LED10.A
N$5
  Top 0.61: R8.2 99.73,84.23 LED24.A
N$6
  Top 0.61: LED25.A 155.32,109.82 R15.2
N$7
  Top 0.61: R21.2 99.73,74.07 LED26.A
N$8
  Top 0.61: LED27.A 135.32,109.82 R29.2
N$9
  Top 0.61: R34.2 111.22,136.49 LED28.A
N$10
  Top 0.61: R10.2 96.55,44.86 LED9.A
N$11
  Top 0.61: R38.2 195.32,109.82 LED29.A
N$12
  Top 0.61: LED30.A 74.65,110.49 R40.1
N$13
  Top 0.61: LED12.A 90.71,110.13 R23.2
N$14
  Top 0.61: LED31.A 35.28,110.41 R45.2
N$15
  Top 0.61: R47.2 179.8,109.82 178.66,108.67 176.46,108.67 LED32.A
N$16
  Top 0.61: LED7.A 85,110.26 86.08,111.34 R14.2
N$17
  Top 0.61: R52.2 98.15,64.86 LED33.A
N$18
  Top 0.61: LED6.A 165.32,109.82 R17.2
N$19
  Top 0.61: R32.1 111.22,125.31 LED3.A
N$20
  Top 0.61: LED5.A 45.44,110.57 R19.2
N$21
  Top 0.61: R58.2 98.93,54.06 LED34.A
N$22
  Top 0.61: LED41.A 55.6,32.47 R59.2
N$23
  Top 0.61: LED42.A 46.71,45.05 R61.2
N$24
  Top 0.61: LED40.A 66.9,45.17 R62.2
N$25
  Top 0.61: R68.2 LED38.A
N$26
  Top 0.61: LED4.A 56.87,112 R26.2
N$28
  Top 0.61: LED2.A 125.32,109.82 R28.2
N$30
  Top 0.61: LED1.A 115.32,109.82 R30.2
N$33
  Top 0.61: U$32.5 40.41,52.79 R68.1
N$42
  Top 0.61: LED22.A 64.49,110.65 R41.2
N$44
  Top 0.61: LED21.A 111.22,165.7 R42.1
N$46
  Top 0.61: R43.1 111.22,145.38 LED20.A
N$56
  Top 0.61: R48.2 110.08,119.98 110.08,117.56 111.35,116.29 LED19.A
N$58
  Top 0.61: LED18.A 145.32,109.82 R49.2
N$60
  Top 0.61: R50.2 185.32,109.82 LED17.A
N$68
  Top 0.61: LED16.A 205,115.48 R54.2
N$70
  Top 0.61: LED15.A 5,112.94 R55.2
N$72
  Top 0.61: LED14.A 13.43,111.7 R56.2
RIX2
  Top 0.61: R62.1 55.47,45.17 51.66,48.98 42.77,48.98 41.5,50.25 39.48,50.25 U$32.4
RIX3
  Top 0.61: R61.1 42.64,47.71 38.55,47.71 U$32.3
RIX4
  Top 0.61: R59.1 46.51,36.28 U$32.2
RX
  Top 0.61: U$32.1 27.53,51.8 27.53,52.79 31.34,56.6 33.88,56.6 38.96,61.68 45.31,61.68 51.66,68.03 55.81,68.03 62.15,74.37 63,74.87 63.79,75.65 71.98,75.65 74.52,78.19 78.33,78.19 82.14,74.38 85.95,74.38 JP1.5
S_0  (via drill 0.7)
  Top 0.61: v84.68,66.76 70.71,66.76 69.44,65.49 69.19,65.25 61.58,65.25 61.56,65.23 61.52,65.25 U$32.24 | v94.84,66.76 96.11,68.03 98.65,68.03 99.92,69.3 v108.81,69.3 | v134.21,68.03 135.48,68.03 X1.S0
  Bottom 0.61: v84.68,66.76 v94.84,66.76 | v108.81,69.3 110.08,68.03 v134.21,68.03
S_1  (via drill 0.7)
  Top 0.61: U$32.12 57.12,62.71 57.13,62.69 83.67,62.69 v85.95,60.41 | v93.57,59.14 94.84,60.41 107.54,60.41 108.81,61.68 v113.89,61.68 | v132.94,65.49 135.48,65.49 X1.S1
  Bottom 0.61: v85.95,60.41 87.22,59.14 v93.57,59.14 | v113.89,61.68 116.43,61.68 120.24,65.49 v132.94,65.49
S_2  (via drill 0.7)
  Top 0.61: U$32.11 54.92,61.44 54.93,61.42 81.13,61.42 v84.68,57.87 | v96.11,57.87 97.38,59.14 v106.27,59.14 | v130.4,62.95 135.48,62.95 X1.S2
  Bottom 0.61: v84.68,57.87 v96.11,57.87 | v106.27,59.14 107.54,59.14 108.81,60.41 117.7,60.41 120.24,62.95 v130.4,62.95
S_3  (via drill 0.7)
  Top 0.61: U$32.10 52.72,60.17 52.73,60.15 77.32,60.15 v85.95,51.52 | v93.57,50.25 110.08,50.25 112.62,52.79 v113.89,52.79 | v126.59,57.87 130.4,61.68 138.02,61.68 149.45,73.11 X1.S3
  Bottom 0.61: v85.95,51.52 92.3,51.52 v93.57,50.25 | v113.89,52.79 121.51,52.79 v126.59,57.87
SIG  (via drill 0.7)
  Top 0.61: X1.SIG 146.91,79.46 v131.67,79.46 | v93.57,74.38 98.65,79.46 v108.81,79.46 | v88.49,73.11 87.22,71.84 76.88,71.84 U$32.31/A12
  Bottom 0.61: v131.67,79.46 118.97,79.46 117.7,78.19 111.35,78.19 110.08,79.46 v108.81,79.46 | v93.57,74.38 92.3,73.11 v88.49,73.11
TX
  Top 0.61: U$32.0 26.26,49.6 26.26,55.33 30.07,59.14 33.88,59.14 38.96,64.22 45.31,64.22 51.66,70.57 55.47,70.57 60.81,75.92 60.95,76.44 61.81,76.94 70.72,76.94 74.52,80.73 80.87,80.73 83.41,78.19 JP1.4